# Altium PCB viper_eagle_rep.PcbDoc (part 3 of 4)
Units mm, origin at the board's own origin, x right, y up, seen from the top; angles counter-clockwise.
Board outline 285.4 x 100.18 mm, 2 copper layers (Component Side, Bottom Layer), stack 1.571 mm thick; 351 components, 206 nets, 1213 pads, 248 vias.
Unrouted connection lines stored in the file: 357.
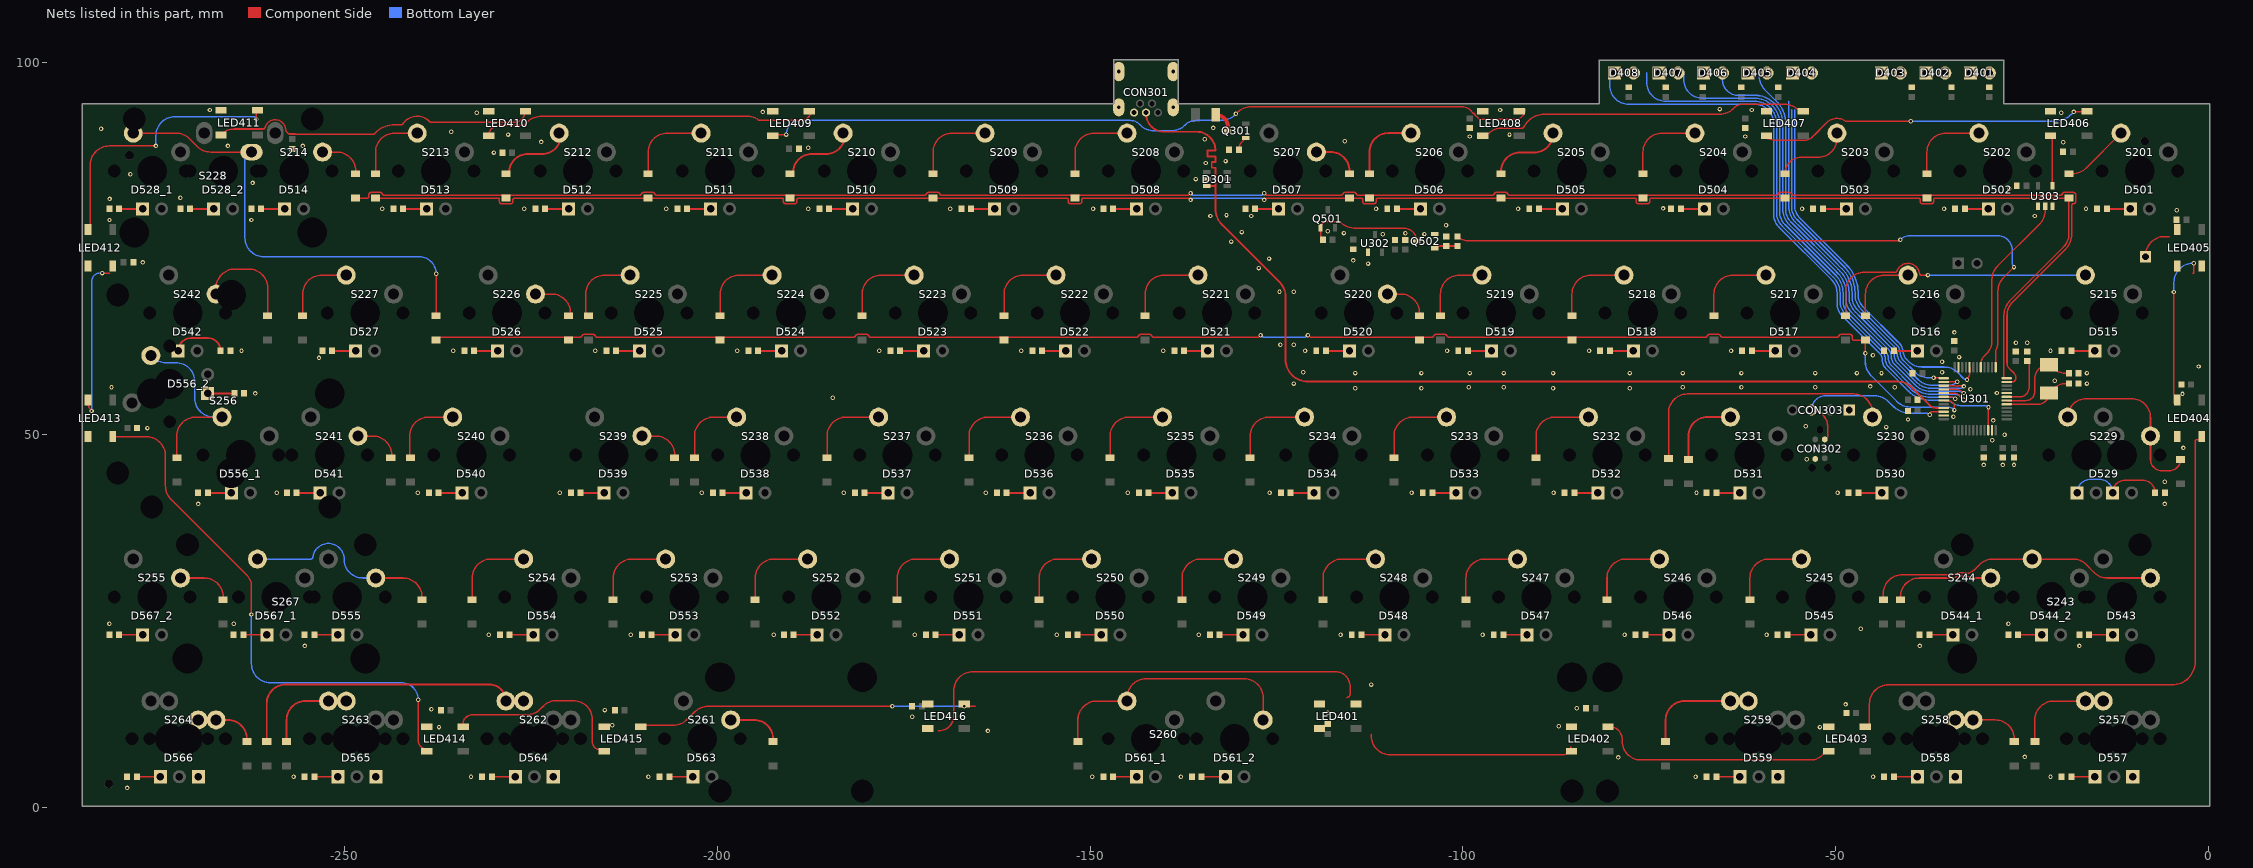
[diagram p2: the nets of this part, all layers, seen from the top]

## Via types
v1: diameter 0.6, hole 0.3, Component Side to Bottom Layer, tented both sides, 247 vias
v2: diameter 1, hole 0.5, Component Side to Bottom Layer, tented both sides, 1 vias

## Nets (pads, with @x,y where several pads share a name; then routed paths per layer and width w, separated by ;. In a path a pad name is that pad's centre, name@x,y a point inside that pad or via, vN(x,y) a via of type N, cw(c..) or ccw(c..) an arc to the next point about the centre after c; other vN are vias at no path point) (continued)
D_P: CON301.3 D301.3 R302.2 U301.33 | length 139.6
  Component Side w0.254: CON301.3@-142.5,93.25 -142.5,93.097 ccw(c-140.081,93.097) -140.081,90.678 -135.712,90.678 cw(c-135.712,88.138) -133.253,88.773 cw(c-135.712,88.138) -133.224,88.646 -133.187,88.287 -133.187,88.138 -134.253,88.138 -134.253,87.376 -133.172,87.376 -133.172,86.614 -133.681,86.614 -133.681,85.852 -133.172,85.852 -133.172,85.725 -133.172,83.312 ; D301.3@-134.344,83.378 -133.238,83.378 -133.172,83.312 ; U301.33@-35.467,53.614 -35.476,53.623 -36.083,53.623 ccw(c-36.114,53.592) -36.114,53.635 -36.511,53.635 cw(c-36.511,54.811) -36.514,53.635 cw(c-36.511,54.811) -37.343,53.98 -39.769,56.406 ccw(c-41.565,54.61) -41.565,57.15 -120.777,57.15 cw(c-120.777,60.147) -123.774,60.147 -123.774,68.62 ccw(c-126.314,68.62) -124.518,70.416 -132.295,78.193 cw(c-130.178,80.31) -133.172,80.31 -133.172,83.312
GND: C301.1 C302.1 C303.1 C304.1 C305.1 C306.1 C307.1 C308.1 C309.2 C310.1 C311.1 C312.1 C313.1 C401.1 C402.1 C403.1 C404.1 C405.1 C406.1 C407.1 C408.1 C409.1 C410.1 C411.1 C412.1 C413.1 C414.1 C415.1 C416.1 CON301.5 CON301.S CON302.5 CON303.4 D301.2 LED401.3 LED402.3 LED403.3 LED404.3 LED405.3 LED406.3 LED407.3 LED408.3 LED409.3 LED410.3 LED411.3 LED412.3 LED413.3 LED414.3 LED415.3 LED416.3 Q502.2 R304.1 R305.2 R501.1 R502.1 R503.1 R504.1 R505.1 R506.1 R507.1 R508.1 R509.1 R510.1 R511.1 R512.1 R513.1 R514.1 R515.1 R516.1 R517.1 R518.1 R519.1 R520.1 R521.1 R522.1 R523.1 R524.1 R525.1 R526.1 R527.1 R528_1.1 R528_2.1 R529.1 R530.1 R531.1 R532.1 R533.1 R534.1 R535.1 R536.1 R537.1 R538.1 R539.1 R540.1 R541.1 R542.1 R543.1 R544.1 R545.1 R546.1 R547.1 R548.1 R549.1 R550.1 R551.1 R552.1 R553.1 R554.1 R554_2.1 R555.1 R556.1 R556_2.1 R557.1 R558.1 R559.1 R561_1.1 R561_2.1 R563.1 R565.1 R566.1 R567_1.1 R567_2.1 R570.2 R654.1 U301.8 U301.23 U301.35 U301.47 U302.1 U303.1 U303.3
  other v1: -279.198,2.64 -256.875,4.135 -233.068,4.135 -209.256,4.135 -149.724,4.135 -137.818,4.135 -68.762,4.135 -44.944,4.135 -21.137,4.135 -79.121,6.731 -24.58,6.796 -163.703,10.287 -237.363,10.795 -52.07,10.795 -87.122,10.922 -214.122,11.049 -173.863,12.192 -118.11,12.7 -215.138,13.081 -238.379,13.208 -84.709,13.335 -48.641,13.843 -112.268,16.51 -255.385,21.69 -38.69,21.69 -17.261,21.69 -230.687,23.185 -211.637,23.185 -192.46,23.185 -173.537,23.185 -154.487,23.185 -135.437,23.185 -116.387,23.185 -97.337,23.185 -78.287,23.185 -59.237,23.185 -46.609,24.003 -281.58,24.68 -264.91,24.68 -26.786,24.68 -269.68,40.74 -5.801,40.74 -259.13,42.235 -240.212,42.235 -221.162,42.235 -202.112,42.235 -183.062,42.235 -164.012,42.235 -144.962,42.235 -125.912,42.235 -106.862,42.235 -87.812,42.235 -68.635,42.235 -49.712,42.235 -5.801,43.73 -30.099,45.974 -27.559,45.974 -26.035,45.974 -53.848,46.736 -3.302,48.26 -28.956,49.276 -27.305,50.038 -276.479,50.927 -43.18,51.054 -53.975,51.181 -28.829,51.943 -40.259,52.07 -34.163,52.451 -184.531,54.991 -3.429,55.499 -262.015,55.575 -28.321,55.626 -31.877,56.134 -114.427,56.261 -105.537,56.261 -87.884,56.261 -77.597,56.261 -281.305,56.388 -99.187,56.388 -94.488,56.388 -70.485,56.388 -62.611,56.388 -52.705,56.388 -42.037,56.388 -45.339,56.515 -122.682,56.896 -16.256,56.896 -20.574,57.277 -114.427,58.293 -105.537,58.293 -99.06,58.293 -94.488,58.293 -87.884,58.293 -77.597,58.293 -70.485,58.293 -62.611,58.293 -52.705,58.293 -47.117,58.293 -43.815,58.293 -16.256,58.293 -121.412,58.42 -35.687,58.42 -1.27,59.182 -35.687,59.817 -253.463,60.325 -33.401,60.452 -44.958,60.706 -263.862,61.285 -235.45,61.285 -216.4,61.285 -197.35,61.285 -178.3,61.285 -159.25,61.285 -140.2,61.285 -121.15,61.285 -102.1,61.285 -83.05,61.285 -64,61.285 -21.137,61.285 -124.46,62.103 -122.682,62.103 -25.781,62.357 -24.257,62.357 -34.036,63.754 -124.587,69.215 -122.682,69.215 -127.381,72.39 -112.71,72.997 -277.114,73.152 -114.681,73.42 -125.984,73.66 -131.064,75.946 -110.744,76.933 -105.144,76.95 -107.696,77.06 -115.951,77.089 -129.667,77.216 -118.11,77.343 -102.235,78.145 -281.574,78.84 -262.53,78.84 -133.858,79.375 -128.368,79.375 -23.241,79.375 -131.699,79.502 -4.191,80.137 -244.975,80.335 -225.925,80.335 -206.875,80.335 -187.825,80.335 -168.775,80.335 -149.606,80.335 -111.625,80.335 -92.575,80.335 -54.475,80.335 -35.425,80.335 -16.375,80.335 -73.123,80.391 -281.559,81.661 -272.049,81.83 -26.67,83.058 -262.382,83.82 -135.839,84.328 -278.765,84.992 -134.493,86.487 -131.826,86.741 -229.997,87.884 -187.833,88.519 -265.684,88.773 -255.651,88.773 -19.431,89.281 -223.647,89.31 -115.824,89.408 -134.62,89.662 -99.06,90.043 -62.103,90.043 -228.092,90.297 -93.726,90.297 -235.712,90.678 -282.702,91.088 -133.477,91.186 -96.647,91.567 -232.283,93.218 -19.685,93.218 -193.929,93.345 -268.097,93.599 -94.996,93.599 -61.214,93.599 -65.532,93.726
led1: D401.2 U301.20 | length 49.9
  Component Side w0.203: v1(-32.341,57.404) -32.341,57.448 ccw(c-33.182,58.29) -31.998,58.171 ccw(c-33.182,58.29) -31.992,58.29 U301.20@-31.992,59.089
  Bottom Layer w0.203: -55.471,93.599 -55.471,80.834 ccw(c-52.931,80.834) -54.727,79.038 -48.55,72.862 -48.534,72.845 cw(c-52.324,69.052) -48.529,72.84 cw(c-52.324,69.052) -47.1,70.264 cw(c-52.324,69.052) -46.965,69.246 ccw(c-46.762,69.253) -46.962,69.215 -46.962,68.896 ccw(c-44.422,68.896) -46.218,67.1 -41.629,62.511 -41.439,62.321 cw(c-42.752,61.007) -41.437,62.319 cw(c-42.752,61.007) -40.907,61.225 ccw(c-40.705,61.249) -40.894,61.174 ccw(c-39.439,61.174) -40.894,61.17 ccw(c-39.439,61.174) -40.468,60.146 -40.181,59.859 ccw(c-38.385,61.655) -38.385,59.115 -35.391,59.115 cw(c-35.391,56.575) -33.595,58.371 -32.831,57.607 ccw(c-32.341,58.098) v1(-32.341,57.404)
led2: D402.2 U301.25 | length 45.5
  Component Side w0.203: v1(-36.83,57.658) U301.25@-35.471,57.658
  Bottom Layer w0.203: -55.874,93.599 -55.874,80.667 ccw(c-53.334,80.667) -55.13,78.871 -48.818,72.56 cw(c-52.324,69.052) -48.814,72.555 cw(c-52.324,69.052) -47.365,69.095 ccw(c-47.162,69.097) -47.365,69.088 -47.365,68.991 -47.365,68.896 ccw(c-44.422,68.896) -46.503,66.815 -46.359,66.671 -41.723,62.036 cw(c-42.752,61.007) -41.297,61.007 ccw(c-39.842,61.007) -40.872,59.979 ; -40.871,59.978 -39.295,58.402 ccw(c-37.499,60.198) -37.797,57.676 ccw(c-37.499,60.198) -37.499,57.658 v1(-36.83,57.658)
led3: D403.2 U301.26 | length 51.3
  Component Side w0.203: U301.26@-35.467,57.114 -33.783,57.114 ccw(c-33.783,57.289) v1@-33.66,57.165
  Bottom Layer w0.203: -56.277,94.742 -56.277,80.667 ccw(c-53.334,80.667) -55.415,78.586 -54.835,78.007 -50.2,73.371 -49.105,72.276 cw(c-52.324,69.052) -49.1,72.271 cw(c-52.324,69.052) -47.768,69.058 -47.768,68.562 ccw(c-45.228,68.562) -47.768,68.557 ccw(c-45.228,68.562) -47.024,66.766 -42.127,61.869 ; -42.126,61.868 cw(c-43.155,60.84) -41.7,60.84 ccw(c-40.246,60.84) -41.275,59.812 -38.882,57.419 ccw(c-37.086,59.215) -37.086,56.675 -34.801,56.675 ccw(c-34.801,58.296) v1(-33.655,57.15)
led4: D404.2 U301.27 | length 59
  Component Side w0.203: U301.27@-35.467,56.614 -33.974,56.614 cw(c-33.973,56.411) -33.893,56.597 ccw(c-33.655,57.15) -33.655,56.548 ccw(c-33.655,57.15) -33.417,56.597 cw(c-33.337,56.411) -33.336,56.614 -33.025,56.614 cw(c-33.025,56.228) v1(-32.752,56.501) v1@-32.639,56.388
  Bottom Layer w0.203: -60.198,98.565 -60.198,98.089 ccw(c-57.658,98.089) -59.454,96.293 -58.162,95.001 cw(c-60.833,91.821) -56.68,91.821 -56.68,80.333 ccw(c-54.14,80.333) -55.936,78.537 -49.66,72.26 -49.389,71.99 cw(c-52.324,69.052) -49.385,71.986 cw(c-52.324,69.052) -48.171,69.06 -48.171,68.654 -48.171,68.562 ccw(c-45.228,68.562) -48.171,68.557 ccw(c-45.228,68.562) -47.31,66.481 -46.612,65.783 -42.53,61.702 cw(c-43.558,60.673) -42.104,60.673 ccw(c-40.649,60.673) -41.678,59.645 ; -41.677,59.644 -39.049,57.016 ccw(c-37.253,58.812) -37.253,56.272 -33.197,56.272 ccw(c-33.197,56.795) -32.828,56.425 v1(-32.752,56.501)
led5: D405.2 U301.28 | length 63.9
  Component Side w0.203: U301.28@-35.467,56.114 -33.944,56.114 cw(c-33.944,54.448) v1(-32.766,55.626)
  Bottom Layer w0.203: -65.151,98.565 -65.151,97.663 ccw(c-63.056,97.663) -63.158,95.571 ccw(c-63.148,95.774) -63.148,95.571 -60.833,95.571 cw(c-60.833,91.821) -60.704,95.568 cw(c-60.833,91.821) -57.083,91.821 -57.083,80.333 ccw(c-54.14,80.333) -56.222,78.252 -54.961,76.992 -50.199,72.229 -49.673,71.704 cw(c-52.324,69.052) -49.671,71.702 cw(c-52.324,69.052) -48.574,69.052 -48.574,68.228 ccw(c-46.034,68.228) -47.83,66.432 -42.933,61.535 ; -42.932,61.534 cw(c-43.962,60.506) -42.507,60.506 ccw(c-41.052,60.506) -42.081,59.478 -40.133,57.53 -39.334,56.73 ccw(c-37.253,58.812) -37.253,55.869 -33.46,55.869 cw(c-33.46,55.04) -32.873,55.626 v1(-32.766,55.626)
led6: D406.2 U301.29 | length 69.7
  Component Side w0.203: U301.29@-35.467,55.614 -34.263,55.614 cw(c-34.263,54.117) -33.204,55.175 v1(-32.766,54.737)
  Bottom Layer w0.203: -70.358,98.565 -70.358,97.707 ccw(c-67.818,97.707) -67.818,95.167 -60.833,95.167 cw(c-60.833,91.821) -57.487,91.821 -57.487,79.999 ccw(c-54.947,79.999) -56.743,78.203 -50.293,71.754 -49.958,71.418 ; -49.957,71.417 cw(c-52.324,69.052) -48.978,69.052 -48.978,68.061 ccw(c-46.438,68.061) -48.234,66.265 -43.336,61.368 cw(c-44.365,60.339) -42.91,60.339 ccw(c-41.455,60.339) -42.485,59.311 ; -42.484,59.31 -39.618,56.444 ccw(c-37.253,58.812) -37.253,55.466 -34.01,55.466 cw(c-34.01,54.222) -33.96,55.465 ; -33.941,55.465 cw(c-33.909,54.864) -33.909,55.466 cw(c-33.909,54.864) -33.694,55.426 ccw(c-33.622,55.616) -33.676,55.42 cw(c-34.01,54.222) -33.13,55.101 v1(-32.766,54.737)
led7: D407.2 U301.30 | length 72.4
  Component Side w0.203: U301.30@-35.467,55.114 -34.513,55.114 cw(c-34.513,54.26) v1(-33.909,54.864)
  Bottom Layer w0.203: -75.311,98.565 -75.311,97.304 ccw(c-72.771,97.304) -72.771,94.764 -60.833,94.764 cw(c-60.833,91.821) -57.89,91.821 -57.89,79.832 ccw(c-55.35,79.832) -57.146,78.036 -51.15,72.04 -50.242,71.132 cw(c-52.324,69.052) -49.381,69.052 -49.381,68.061 ccw(c-46.438,68.061) -48.519,65.98 -48.038,65.5 -43.784,61.245 ; -43.783,61.245 cw(c-44.92,60.109) -43.315,60.193 ccw(c-43.112,60.203) -43.313,60.172 ccw(c-41.858,60.172) -43.313,60.168 ccw(c-41.858,60.172) -42.888,59.144 -40.45,56.706 -39.902,56.158 ccw(c-37.253,58.812) -37.253,55.062 -34.388,55.062 cw(c-34.388,54.385) -33.999,54.94 cw(c-34.388,54.385) v1(-33.909,54.864)
led8: D408.2 U301.46 | length 83.9
  Component Side w0.203: U301.46@-29.492,50.639 v1@-29.492,53.723
  Bottom Layer w0.203: D408.2@-80.264,98.565 -80.264,96.901 ccw(c-77.724,96.901) -77.724,94.361 -60.833,94.361 cw(c-60.833,91.821) -58.293,91.821 -58.293,79.665 ccw(c-55.753,79.665) -57.549,77.869 -50.528,70.848 cw(c-52.324,69.052) -49.784,69.052 -49.784,67.727 ccw(c-47.244,67.727) -49.04,65.931 -44.069,60.96 cw(c-44.92,60.109) -43.716,60.109 ccw(c-42.011,60.109) -43.217,58.903 ; -43.217,58.903 -40.187,55.873 ccw(c-37.253,58.812) -40.138,55.825 ; -40.137,55.824 ccw(c-37.253,58.812) -37.87,54.705 ccw(c-37.253,58.812) -37.253,54.659 -34.969,54.659 cw(c-34.969,54.058) -34.544,54.483 ccw(c-33.241,55.786) -33.241,53.943 -30.02,53.943 cw(c-30.02,53.19) -29.487,53.723 v1(-29.457,53.723)
NetC307_2: C307.2 U301.5 X301.1 | length 9.6
  Component Side w0.203: U301.5@-27.017,54.114 -22.853,54.114 ccw(c-22.853,55.631) -22.225,54.25 ccw(c-22.853,55.631) X301.1@-21.336,55.631 -20.815,56.152 cw(c-19.019,54.356) -19.019,56.896 C307.2@-18.684,56.896
NetC308_2: C308.2 U301.6 X301.2 | length 12.2
  Component Side w0.203: U301.6@-27.017,54.614 -24.446,54.614 ccw(c-24.446,55.819) -23.241,55.819 -23.241,57.526 cw(c-21.336,57.526) X301.2@-21.336,59.431 -20.942,59.037 ccw(c-19.146,60.833) -19.146,58.293 C308.2@-18.684,58.293
NetCON401_1: CON401.1 LED405.2 | length 4.8
  Component Side w0.203: CON401.1@-8.382,73.914 -8.382,74.078 cw(c-5.842,74.078) -5.842,76.618 -5.206,76.618
NetD201_1: D201.1 S201.1 | length 9.1
  Component Side w0.203: D201.1@-18.669,85.05 -18.187,85.05 ccw(c-18.187,87.59) -16.391,85.794 S201.1@-11.69,90.495
NetD202_1: D202.1 S202.1 | length 11.3
  Component Side w0.203: D202.1@-37.719,85.05 -37.719,87.955 cw(c-35.179,87.955) -35.179,90.495 S202.1@-30.74,90.495
NetD203_1: D203.1 S203.1 | length 10.4
  Component Side w0.203: D203.1@-56.769,85.05 cw(c-54.57,85.05) -55.958,86.755 cw(c-54.57,85.05) -54.57,87.249 -52.33,87.249 ccw(c-52.33,89.789) -49.991,88.8 ccw(c-52.33,89.789) -49.79,89.789 S203.1@-49.79,90.495
NetD204_1: D204.1 S204.1 | length 11.3
  Component Side w0.203: D204.1@-75.819,85.05 -75.819,87.955 cw(c-73.279,87.955) -73.279,90.495 S204.1@-68.84,90.495
NetD205_1: D205.1 S205.1 | length 10.2
  Component Side w0.254: D205.1@-94.869,85.05 -94.869,85.344 cw(c-92.329,85.344) -92.329,87.884 -90.43,87.884 ccw(c-90.43,90.424) -87.89,90.424 S205.1@-87.89,90.495
NetD206_1: D206.1 S206.1 | length 9.9
  Component Side w0.254: D206.1@-112.522,85.05 -112.522,87.955 cw(c-109.982,87.955) -109.982,90.495 S206.1@-106.94,90.495
NetD207_1: D207.1 S207.1 | length 6.3
  Component Side w0.254: S207.1@-119.64,87.955 -117.729,87.955 cw(c-117.729,85.415) -115.189,85.415 D207.1@-115.189,85.05
NetD208_1: D208.1 S208.1 | length 11.3
  Component Side w0.203: D208.1@-152.019,85.05 -152.019,87.955 cw(c-149.479,87.955) -149.479,90.495 S208.1@-145.04,90.495
NetD209_1: D209.1 S209.1 | length 11.3
  Component Side w0.203: D209.1@-171.069,85.05 -171.069,87.955 cw(c-168.529,87.955) -168.529,90.495 S209.1@-164.09,90.495
NetD210_1: D210.1 S210.1 | length 10.2
  Component Side w0.254: D210.1@-189.871,84.867 -189.871,85.161 cw(c-187.331,85.161) -187.331,87.701 -185.432,87.701 ccw(c-185.432,90.241) -182.892,90.241 S210.1@-182.892,90.312
NetD211_1: D211.1 S211.1 | length 11.5
  Component Side w0.203: D211.1@-209.296,85.05 -209.296,87.955 cw(c-206.756,87.955) -206.756,90.495 S211.1@-202.19,90.495
NetD212_1: D212.1 S212.1 | length 10.2
  Component Side w0.254: D212.1@-227.971,84.867 -227.971,85.161 cw(c-225.431,85.161) -225.431,87.701 -223.532,87.701 ccw(c-223.532,90.241) -220.992,90.241 S212.1@-220.992,90.312
NetD213_1: D213.1 S213.1 | length 9.9
  Component Side w0.203: D213.1@-245.872,85.05 -245.872,87.955 cw(c-243.332,87.955) -243.332,90.495 -240.538,90.495 S213.1@-240.29,90.495
NetD214_1: D214.1 S214.1 | length 6.3
  Component Side w0.203: S214.1@-252.99,87.955 -251.079,87.955 cw(c-251.079,85.415) -248.539,85.415 D214.1@-248.539,85.05
NetD215_1: D215.1 S215.2 | length 38.3
  Component Side w0.203: D215.1@-48.641,66 -48.641,69.308 cw(c-46.101,69.308) -46.101,71.848 -42.672,71.848 -41.933,71.848 ccw(c-41.933,72.051) -41.742,71.982 cw(c-40.265,71.445) -38.704,71.625 ccw(c-38.502,71.648) -38.502,71.445 v1(-37.592,71.445)
  Bottom Layer w0.203: v1(-37.592,71.445) S215.2@-16.452,71.445
NetD216_1: D216.1 S216.1 | length 10.1
  Component Side w0.203: D216.1@-45.974,66 -45.974,68.905 cw(c-43.434,68.905) -43.434,71.445 S216.1@-40.265,71.445
NetD217_1: D217.1 S217.1 | length 11.3
  Component Side w0.203: D217.1@-66.294,66 -66.294,68.905 cw(c-63.754,68.905) -63.754,71.445 S217.1@-59.315,71.445
NetD218_1: D218.1 S218.1 | length 11.3
  Component Side w0.203: D218.1@-85.344,66 -85.344,68.905 cw(c-82.804,68.905) -82.804,71.445 S218.1@-78.365,71.445
NetD219_1: D219.1 S219.1 | length 9.9
  Component Side w0.203: D219.1@-102.997,66 -102.997,68.905 cw(c-100.457,68.905) -100.457,71.445 S219.1@-97.415,71.445
NetD220_1: D220.1 S220.1 | length 6.1
  Component Side w0.203: S220.1@-110.115,68.905 -108.331,68.905 cw(c-108.331,66.365) -105.791,66.365 D220.1@-105.791,66
NetD221_1: D221.1 S221.1 | length 11.5
  Component Side w0.203: D221.1@-142.621,66 -142.621,68.905 cw(c-140.081,68.905) -140.081,71.445 S221.1@-135.515,71.445
NetD222_1: D222.1 S222.1 | length 11.3
  Component Side w0.203: D222.1@-161.544,66 -161.544,68.905 cw(c-159.004,68.905) -159.004,71.445 S222.1@-154.565,71.445
NetD223_1: D223.1 S223.1 | length 11.3
  Component Side w0.203: D223.1@-180.594,66 -180.594,68.905 cw(c-178.054,68.905) -178.054,71.445 S223.1@-173.615,71.445
NetD224_1: D224.1 S224.1 | length 11.3
  Component Side w0.203: D224.1@-199.644,66 -199.644,68.905 cw(c-197.104,68.905) -197.104,71.445 S224.1@-192.665,71.445
NetD225_1: D225.1 S225.1 | length 10.3
  Component Side w0.203: D225.1@-217.678,66 -217.678,68.905 cw(c-215.138,68.905) -215.138,71.445 S225.1@-211.715,71.445
NetD226_1: D226.1 S226.1 | length 6.5
  Component Side w0.203: S226.1@-224.415,68.905 -222.25,68.905 cw(c-222.25,66.365) -219.71,66.365 D226.1@-219.71,66
NetD227_1: D227.1 S227.1 | length 10.2
  Component Side w0.203: D227.1@-255.651,66 -255.651,68.905 cw(c-253.111,68.905) -253.111,71.445 S227.1@-249.815,71.445
NetD228_1: D228.1 S228.2 | length 63.1
  Component Side w0.203: S228.2@-278.16,90.271 S228.2@-278.384,90.495 -272.649,90.495 cw(c-272.649,87.955) -270.853,89.751 -269.801,88.699 ccw(c-268.005,90.495) -268.005,87.955 S228.2@-262.509,87.955 ; D228.1@-237.744,66 v1(-237.744,71.628)
  Bottom Layer w0.203: S228.2@-262.509,87.955 ccw(c-262.509,87.066) -263.398,87.066 -263.398,76.454 ccw(c-260.858,76.454) -260.858,73.914 -240.03,73.914 cw(c-240.03,71.628) v1(-237.744,71.628)
NetD229_1: D229.1 S229.1 | length 25.3
  Component Side w0.203: S229.1@-18.834,52.395 cw(c-16.365,52.395) -16.365,54.864 -10.261,54.864 cw(c-10.261,52.324) -7.721,52.324 S229.1@-7.721,49.855 -7.721,46.71 ccw(c-6.223,46.71) -6.223,45.212 -5.191,45.212 ccw(c-5.191,46.72) D229.1@-3.683,46.72
NetD230_1: D230.1 S230.1 | length 36.9
  Component Side w0.203: D230.1@-72.39,46.847 -72.39,52.959 cw(c-69.85,52.959) -69.85,55.499 -47.567,55.499 cw(c-47.567,52.959) -45.027,52.959 S230.1@-45.027,52.395
NetD231_1: D231.1 S231.1 | length 10.2
  Component Side w0.254: D231.1@-69.723,46.72 -69.723,49.855 cw(c-67.183,49.855) -67.183,52.395 S231.1@-64.077,52.395
NetD232_1: D232.1 S232.1 | length 11.4
  Component Side w0.203: D232.1@-90.17,46.95 -90.17,49.855 cw(c-87.63,49.855) -87.63,52.395 S232.1@-83.127,52.395
NetD233_1: D233.1 S233.1 | length 11.4
  Component Side w0.203: D233.1@-109.22,46.95 -109.22,49.855 cw(c-106.68,49.855) -106.68,52.395 S233.1@-102.177,52.395
NetD234_1: D234.1 S234.1 | length 12.5
  Component Side w0.203: D234.1@-128.524,46.95 -128.524,49.855 cw(c-125.984,49.855) -125.984,52.395 S234.1@-121.227,52.395
  Bottom Layer w0.254: S234.1@-121.793,51.83 S234.1@-121.227,52.395
NetD235_1: D235.1 S235.1 | length 11.4
  Component Side w0.203: D235.1@-147.32,46.95 -147.32,49.855 cw(c-144.78,49.855) -144.78,52.395 S235.1@-140.277,52.395
NetD236_1: D236.1 S236.1 | length 11.3
  Component Side w0.203: D236.1@-166.243,46.95 -166.243,49.855 cw(c-163.703,49.855) -163.703,52.395 S236.1@-159.327,52.395
NetD237_1: D237.1 S237.1 | length 11.3
  Component Side w0.203: D237.1@-185.293,46.95 -185.293,49.855 cw(c-182.753,49.855) -182.753,52.395 S237.1@-178.377,52.395
NetD238_1: D238.1 S238.1 | length 10
  Component Side w0.203: D238.1@-203.073,46.95 -203.073,49.855 cw(c-200.533,49.855) -200.533,52.395 S238.1@-197.427,52.395
NetD239_1: D239.1 S239.1 | length 6.2
  Component Side w0.203: S239.1@-210.127,49.855 -208.28,49.855 cw(c-208.28,47.315) -205.74,47.315 D239.1@-205.74,46.95
NetD240_1: D240.1 S240.1 | length 10.1
  Component Side w0.203: D240.1@-241.3,46.95 -241.3,49.855 cw(c-238.76,49.855) -238.76,52.395 S240.1@-235.527,52.395
NetD241_1: D241.1 S241.1 | length 6.3
  Component Side w0.203: S241.1@-248.202,49.855 -246.253,49.855 cw(c-246.253,47.315) -243.713,47.315 D241.1@-243.713,46.95
NetD242_1: D242.1 S242.1 | length 15
  Component Side w0.203: S242.1@-267.277,68.905 -267.277,69.723 cw(c-264.737,69.723) -264.737,72.263 -263.779,72.263 -262.89,72.263 cw(c-262.89,69.723) -260.35,69.723 D242.1@-260.35,66
  Bottom Layer w0.254: S242.1@-267.734,68.448 S242.1@-267.277,68.905
NetD243_1: D243.1 S243.1 | length 39.6
  Component Side w0.203: D243.1@-43.561,27.9 -43.561,28.719 cw(c-41.021,28.719) -41.021,31.259 -34.276,31.259 ccw(c-34.276,31.462) -34.199,31.274 cw(c-32.96,28.265) -32.214,31.433 ccw(c-32.168,31.631) -32.093,31.442 ccw(c-33.039,33.799) -31.243,32.003 -30.645,32.601 cw(c-28.849,30.805) -28.849,33.345 S243.1@-23.596,33.345 -18.141,33.345 cw(c-18.141,30.805) -16.345,32.601 -15.293,31.549 ccw(c-13.497,33.345) -13.497,30.805 S243.1@-7.721,30.805
NetD244_1: D244.1 S244.1 | length 14
  Component Side w0.203: D244.1@-41.275,27.9 -41.275,28.265 cw(c-38.735,28.265) -38.735,30.805 -34.256,30.805 ccw(c-34.256,31.059) -34.149,30.829 cw(c-32.96,28.265) -31.771,30.829 ccw(c-31.664,31.059) -31.664,30.805 S244.1@-29.15,30.805
NetD245_1: D245.1 S245.1 | length 11.3
  Component Side w0.203: D245.1@-61.468,27.9 -61.468,30.805 cw(c-58.928,30.805) -58.928,33.345 S245.1@-54.552,33.345
NetD246_1: D246.1 S246.1 | length 12.4
  Component Side w0.203: D246.1@-80.645,27.9 -80.645,30.805 cw(c-78.105,30.805) -78.105,33.345 S246.1@-73.602,33.345 S246.1@-74.295,32.652
NetD247_1: D247.1 S247.1 | length 11.3
  Component Side w0.203: D247.1@-99.568,27.9 -99.568,30.805 cw(c-97.028,30.805) -97.028,33.345 S247.1@-92.652,33.345
NetD248_1: D248.1 S248.1 | length 11.4
  Component Side w0.203: D248.1@-118.745,27.9 -118.745,30.805 cw(c-116.205,30.805) -116.205,33.345 S248.1@-111.702,33.345
NetD249_1: D249.1 S249.1 | length 11.3
  Component Side w0.203: D249.1@-137.668,27.9 -137.668,30.805 cw(c-135.128,30.805) -135.128,33.345 S249.1@-130.752,33.345
NetD250_1: D250.1 S250.1 | length 11.4
  Component Side w0.203: D250.1@-156.845,27.9 -156.845,30.805 cw(c-154.305,30.805) -154.305,33.345 S250.1@-149.802,33.345
NetD251_1: D251.1 S251.1 | length 11.4
  Component Side w0.203: D251.1@-175.895,27.9 -175.895,30.805 cw(c-173.355,30.805) -173.355,33.345 S251.1@-168.852,33.345
NetD252_1: D252.1 S252.1 | length 11.4
  Component Side w0.203: D252.1@-194.945,27.9 -194.945,30.805 cw(c-192.405,30.805) -192.405,33.345 S252.1@-187.902,33.345
NetD253_1: D253.1 S253.1 | length 11.4
  Component Side w0.203: D253.1@-213.995,27.9 -213.995,30.805 cw(c-211.455,30.805) -211.455,33.345 S253.1@-206.952,33.345
NetD254_1: D254.1 S254.1 | length 11.3
  Component Side w0.203: D254.1@-232.918,27.9 -232.918,30.805 cw(c-230.378,30.805) -230.378,33.345 S254.1@-226.002,33.345
NetD255_1: D255.1 S255.1 | length 7.5
  Component Side w0.203: S255.1@-272.04,30.805 -268.859,30.805 cw(c-268.859,28.265) -266.319,28.265 D255.1@-266.319,27.9
NetD256_1: D256.1 S256.1 | length 25.4
  Component Side w0.203: S256.1@-275.642,61.547 S256.1@-275.617,61.573 ; D256.1@-272.542,46.95 -272.542,49.855 cw(c-270.002,49.855) -270.002,52.395 S256.1@-266.49,52.395
  Bottom Layer w0.203: S256.1@-276.02,60.655 -275.799,60.434 ccw(c-274.003,62.23) -274.003,59.69 -272.669,59.69 cw(c-272.669,57.15) -270.129,57.15 -270.129,54.935 ccw(c-267.589,54.935) -267.589,52.395 S256.1@-266.49,52.395
NetD257_1: D257.1 S257.2 | length 11.1
  Component Side w0.203: D257.1@-23.241,8.85 -23.241,11.755 cw(c-20.701,11.755) -20.701,14.295 S257.2@-16.452,14.295
NetD258_1: D258.1 S258.1 | length 9.7
  Component Side w0.203: S258.1@-33.909,11.755 S258.1@-31.528,11.755 -28.54,11.755 cw(c-28.54,9.215) -26,9.215 D258.1@-26,8.85
NetD259_1: D259.1 S259.2 | length 13
  Component Side w0.254: D259.1@-72.771,8.85 -72.771,11.755 cw(c-70.231,11.755) -70.231,14.295 S259.2@-64.077,14.295
NetD260_1: D260.1 S260.2 | length 35.5
  Component Side w0.203: D260.1@-151.638,8.85 -151.638,11.755 cw(c-149.098,11.755) -149.098,14.295 S260.2@-145.039,14.295 -145.039,14.732 cw(c-142.499,14.732) -142.499,17.272 -129.323,17.272 cw(c-129.323,14.732) -126.783,14.732 S260.2@-126.783,11.755
NetD261_1: D261.1 S261.1 | length 7.5
  Component Side w0.254: S261.1@-198.221,11.755 -195.072,11.755 cw(c-195.072,9.215) -192.532,9.215 D261.1@-192.532,8.85
NetD262_1: D262.1 S262.2 | length 39.9
  Component Side w0.254: D262.1@-260.477,8.85 -260.477,13.97 cw(c-257.937,13.97) -257.937,16.51 -230.598,16.51 cw(c-230.598,14.295) S262.2@-228.383,14.295
NetD263_1: D263.1 S263.2 | length 10
  Component Side w0.254: D263.1@-257.81,8.85 -257.81,11.755 cw(c-255.27,11.755) -255.27,14.295 S263.2@-252.19,14.295
NetD264_1: D264.1 S264.1 | length 8.3
  Component Side w0.254: S264.1@-269.658,11.755 S264.1@-267.277,11.755 -265.684,11.755 cw(c-265.684,9.215) -263.144,9.215 D264.1@-263.144,8.85
NetD267_1: D267.1 S267.1 | length 27.7
  Component Side w0.203: S267.1@-245.845,30.805 -242.189,30.805 cw(c-242.189,28.265) -239.649,28.265 D267.1@-239.649,27.9
  Bottom Layer w0.203: S267.1@-261.72,33.345 -254.537,33.345 ccw(c-254.537,33.599) -254.285,33.572 cw(c-252.195,33.345) -250.105,33.572 cw(c-252.195,33.345) -250.105,33.57 cw(c-252.195,33.345) -250.099,33.192 -250.1,33.176 ccw(c-247.565,33.345) -247.565,30.805 S267.1@-245.845,30.805
NetD401_1: D401.1 R401.2
NetD402_1: D402.1 R402.2
NetD403_1: D403.1 R403.2
NetD404_1: D404.1 R404.2
NetD405_1: D405.1 R405.2
NetD406_1: D406.1 R406.2
NetD407_1: D407.1 R407.2
NetD408_1: D408.1 R408.2
NetD501_2: D501.2 R501.2 | length 3.2
  Component Side w0.254: R501.2@-13.58,80.335 D501.2@-10.42,80.335
NetD502_2: D502.2 R502.2 | length 3.2
  Component Side w0.254: R502.2@-32.63,80.335 D502.2@-29.47,80.335
NetD503_2: D503.2 R503.2 | length 3.2
  Component Side w0.254: R503.2@-51.68,80.335 D503.2@-48.52,80.335
NetD504_2: D504.2 R504.2 | length 3.2
  Component Side w0.254: R504.2@-70.73,80.335 D504.2@-67.57,80.335
NetD505_2: D505.2 R505.2 | length 3.2
  Component Side w0.254: R505.2@-89.78,80.335 D505.2@-86.62,80.335
NetD506_2: D506.2 R506.2 | length 3.2
  Component Side w0.254: R506.2@-108.83,80.335 D506.2@-105.67,80.335
NetD507_2: D507.2 R507.2 | length 3.2
  Component Side w0.254: R507.2@-127.88,80.335 D507.2@-124.72,80.335
NetD508_2: D508.2 R508.2 | length 3.2
  Component Side w0.254: R508.2@-146.93,80.335 D508.2@-143.77,80.335
NetD509_2: D509.2 R509.2 | length 3.2
  Component Side w0.254: R509.2@-165.98,80.335 D509.2@-162.82,80.335
NetD510_2: D510.2 R510.2 | length 3.2
  Component Side w0.254: R510.2@-185.03,80.335 D510.2@-181.87,80.335
NetD511_2: D511.2 R511.2 | length 3.2
  Component Side w0.254: R511.2@-204.08,80.335 D511.2@-200.92,80.335
NetD512_2: D512.2 R512.2 | length 3.2
  Component Side w0.254: R512.2@-223.13,80.335 D512.2@-219.97,80.335
NetD513_2: D513.2 R513.2 | length 3.2
  Component Side w0.254: R513.2@-242.18,80.335 D513.2@-239.02,80.335
NetD514_2: D514.2 R514.2 | length 3.2
  Component Side w0.254: R514.2@-261.23,80.335 D514.2@-258.07,80.335
NetD515_2: D515.2 R515.2 | length 3.2
  Component Side w0.254: R515.2@-18.342,61.285 D515.2@-15.182,61.285
NetD516_2: D516.2 R516.2 | length 3.2
  Component Side w0.254: R516.2@-42.155,61.285 D516.2@-38.995,61.285
NetD517_2: D517.2 R517.2 | length 3.2
  Component Side w0.254: R517.2@-61.205,61.285 D517.2@-58.045,61.285
NetD518_2: D518.2 R518.2 | length 3.2
  Component Side w0.254: R518.2@-80.255,61.285 D518.2@-77.095,61.285
NetD519_2: D519.2 R519.2 | length 3.2
  Component Side w0.254: R519.2@-99.305,61.285 D519.2@-96.145,61.285
NetD520_2: D520.2 R520.2 | length 3.2
  Component Side w0.254: R520.2@-118.355,61.285 D520.2@-115.195,61.285
NetD521_2: D521.2 R521.2 | length 3.2
  Component Side w0.254: R521.2@-137.405,61.285 D521.2@-134.245,61.285
NetD522_2: D522.2 R522.2 | length 3.2
  Component Side w0.254: R522.2@-156.455,61.285 D522.2@-153.295,61.285
NetD523_2: D523.2 R523.2 | length 3.2
  Component Side w0.254: R523.2@-175.505,61.285 D523.2@-172.345,61.285
NetD524_2: D524.2 R524.2 | length 3.2
  Component Side w0.254: R524.2@-194.555,61.285 D524.2@-191.395,61.285
NetD525_2: D525.2 R525.2 | length 3.2
  Component Side w0.254: R525.2@-213.605,61.285 D525.2@-210.445,61.285
NetD526_2: D526.2 R526.2 | length 3.2
  Component Side w0.254: R526.2@-232.655,61.285 D526.2@-229.495,61.285
NetD527_2: D527.2 R527.2 | length 3.2
  Component Side w0.254: R527.2@-251.705,61.285 D527.2@-248.545,61.285
NetD528_1_2: D528_1.2 R528_1.2 | length 3.2
  Component Side w0.254: R528_1.2@-280.274,80.335 D528_1.2@-277.114,80.335
NetD528_2_2: D528_2.2 R528_2.2 | length 3.2
  Component Side w0.254: R528_2.2@-270.749,80.335 D528_2.2@-267.589,80.335
NetD529_2: D529.2 R529.2 | length 14.5
  Component Side w0.203: D529.2@-12.801,42.235 cw(c-11.094,42.235) -11.094,43.942 -8.808,43.942 cw(c-8.808,42.235) R529.2@-7.101,42.235
  Bottom Layer w0.203: D529.2@-17.564,42.235 cw(c-15.73,42.235) -15.73,44.069 -14.635,44.069 cw(c-14.635,42.235) D529.2@-12.801,42.235
NetD530_2: D530.2 R530.2 | length 3.2
  Component Side w0.254: R530.2@-46.917,42.235 D530.2@-43.757,42.235
NetD531_2: D531.2 R531.2 | length 3.2
  Component Side w0.254: R531.2@-65.967,42.235 D531.2@-62.807,42.235
NetD532_2: D532.2 R532.2 | length 3.2
  Component Side w0.254: R532.2@-85.017,42.235 D532.2@-81.857,42.235
NetD533_2: D533.2 R533.2 | length 3.2
  Component Side w0.254: R533.2@-104.067,42.235 D533.2@-100.907,42.235
NetD534_2: D534.2 R534.2 | length 3.2
  Component Side w0.254: R534.2@-123.117,42.235 D534.2@-119.957,42.235
NetD535_2: D535.2 R535.2 | length 3.2
  Component Side w0.254: R535.2@-142.167,42.235 D535.2@-139.007,42.235
NetD536_2: D536.2 R536.2 | length 3.2
  Component Side w0.254: R536.2@-161.217,42.235 D536.2@-158.057,42.235
NetD537_2: D537.2 R537.2 | length 3.2
  Component Side w0.254: R537.2@-180.267,42.235 D537.2@-177.107,42.235
NetD538_2: D538.2 R538.2 | length 3.2
  Component Side w0.254: R538.2@-199.317,42.235 D538.2@-196.157,42.235
NetD539_2: D539.2 R539.2 | length 3.2
  Component Side w0.254: R539.2@-218.367,42.235 D539.2@-215.207,42.235
NetD540_2: D540.2 R540.2 | length 3.2
  Component Side w0.254: R540.2@-237.417,42.235 D540.2@-234.257,42.235
NetD541_2: D541.2 R541.2 | length 3.2
  Component Side w0.254: R541.2@-256.462,42.235 D541.2@-253.301,42.235
NetD542_2: D542.2 R542.2 | length 7.6
  Component Side w0.254: D542.2@-272.357,61.285 cw(c-270.651,61.285) -270.651,62.992 -268.364,62.992 cw(c-268.364,61.285) R542.2@-266.657,61.285
NetD543_2: D543.2 R543.2 | length 3.3
  Component Side w0.254: R543.2@-15.961,23.185 D543.2@-12.801,23.185 ccw(c-12.936,23.05) D543.2@-12.936,23.241
NetD544_1_2: D544_1.2 R544.2 | length 3.2
  Component Side w0.254: R544.2@-37.39,23.185 D544_1.2@-34.23,23.185
NetD544_2_2: D544_2.2 R554_2.2 | length 3.2
  Component Side w0.254: R554_2.2@-25.486,23.185 D544_2.2@-22.326,23.185
NetD545_2: D545.2 R545.2 | length 3.2
  Component Side w0.254: R545.2@-56.442,23.185 D545.2@-53.282,23.185
NetD546_2: D546.2 R546.2 | length 3.2
  Component Side w0.254: R546.2@-75.492,23.185 D546.2@-72.332,23.185
NetD547_2: D547.2 R547.2 | length 3.2
  Component Side w0.254: R547.2@-94.542,23.185 D547.2@-91.382,23.185
NetD548_2: D548.2 R548.2 | length 3.2
  Component Side w0.254: R548.2@-113.592,23.185 D548.2@-110.432,23.185
NetD549_2: D549.2 R549.2 | length 3.2
  Component Side w0.254: R549.2@-132.642,23.185 D549.2@-129.482,23.185
NetD550_2: D550.2 R550.2 | length 3.2
  Component Side w0.254: R550.2@-151.692,23.185 D550.2@-148.532,23.185
NetD551_2: D551.2 R551.2 | length 3.2
  Component Side w0.254: R551.2@-170.742,23.185 D551.2@-167.582,23.185
NetD552_2: D552.2 R552.2 | length 3.2
  Component Side w0.254: R552.2@-189.792,23.185 D552.2@-186.632,23.185
NetD553_2: D553.2 R553.2 | length 3.2
  Component Side w0.254: R553.2@-208.842,23.185 D553.2@-205.682,23.185
NetD554_2: D554.2 R554.2 | length 3.2
  Component Side w0.254: R554.2@-227.892,23.185 D554.2@-224.732,23.185
NetD555_2: D555.2 R555.2 | length 3.2
  Component Side w0.254: R555.2@-254.085,23.185 D555.2@-250.925,23.185
NetD556_1_2: D556_1.2 R556.2 | length 3.2
  Component Side w0.254: R556.2@-268.38,42.235 D556_1.2@-265.22,42.235
NetD556_2_2: D556_2.2 R556_2.2 | length 3.2
  Component Side w0.254: D556_2.2@-268.4,55.575 -265.24,55.575
NetD557_2: D557.2 R557.2 | length 3.2
  Component Side w0.254: R557.2@-18.342,4.135 D557.2@-15.182,4.135
NetD558_2: D558.2 R558.2 | length 3.2
  Component Side w0.254: R558.2@-42.149,4.135 D558.2@-38.989,4.135
NetD559_2: D559.2 R559.2 | length 3.2
  Component Side w0.254: R559.2@-65.967,4.135 D559.2@-62.807,4.135
NetD561_1_2: D561_1.2 R561_1.2 | length 3.2
  Component Side w0.254: R561_1.2@-146.929,4.135 D561_1.2@-143.769,4.135
NetD561_2_2: D561_2.2 R561_2.2 | length 3.2
  Component Side w0.254: R561_2.2@-135.023,4.135 D561_2.2@-131.863,4.135
NetD563_2: D563.2 R563.2 | length 3.2
  Component Side w0.254: R563.2@-206.461,4.135 D563.2@-203.301,4.135
NetD564_2: D564.2 R654.2 | length 3.2
  Component Side w0.254: R654.2@-230.273,4.135 D564.2@-227.113,4.135
NetD565_2: D565.2 R565.2 | length 3.2
  Component Side w0.254: R565.2@-254.08,4.135 D565.2@-250.92,4.135
NetD566_2: D566.2 R566.2 | length 3.2
  Component Side w0.254: R566.2@-277.898,4.135 D566.2@-274.738,4.135
NetD567_1_2: D567_1.2 R567_1.2 | length 3.2
  Component Side w0.254: R567_1.2@-263.61,23.185 D567_1.2@-260.45,23.185
NetD567_2_2: D567_2.2 R567_2.2 | length 3.2
  Component Side w0.254: R567_2.2@-280.28,23.185 D567_2.2@-277.12,23.185
NetF301_1: F301.1 Q301.3 | length 3.1
  Component Side w0.508: F301.1@-133.143,92.964 cw(c-133.143,91.323) -131.502,91.323 Q301.3@-131.502,90.805
NetLED401_2: LED401.2 LED402.4 | length 29.4
  Component Side w0.203: -112.275,9.271 -112.275,9.634 ; -112.275,9.869 -112.275,9.634 ; -85.508,8.129 cw(c-86.543,8.129) -86.543,7.094 -90.678,7.094 -106.553,7.094 -109.735,7.094 cw(c-109.735,9.634) -112.275,9.634
NetLED401_4: LED401.4 LED416.2 | length 64.1
  Component Side w0.203: -170.344,10.288 ccw(c-170.344,12.357) -168.275,12.357 -168.275,15.7 cw(c-165.735,15.7) -167.894,17.038 cw(c-165.735,15.7) -165.735,18.24 -117.094,18.24 cw(c-117.094,16.256) -115.534,17.482 cw(c-117.094,16.256) -115.113,16.373 -115.113,15.231 cw(c-115.575,15.231) -115.575,14.769
NetLED402_2: LED402.2 LED403.4 | length 33.2
  Component Side w0.203: LED402.2@-80.519,10.865 -80.316,10.865 cw(c-80.316,9.162) -78.613,9.162 -78.613,8.89 ccw(c-76.109,8.89) -76.109,6.386 -72.517,6.386 -66.929,6.386 -53.261,6.386 ccw(c-53.261,8.43) -51.816,6.985 cw(c-50.587,5.756) -50.587,7.494 LED403.4@-50.329,7.494
NetLED403_2: LED403.2 LED404.4 | length 80.2
  Component Side w0.203: LED403.2@-45.429,10.794 -45.429,13.922 cw(c-42.889,13.922) -42.889,16.462 -4.826,16.462 ccw(c-4.826,19.558) -1.73,19.558 -1.73,49.163 cw(c-1.527,49.163) -1.527,49.366 LED404.4@-1.271,49.366
NetLED404_2: LED404.2 LED405.4 | length 21.8
  Component Side w0.203: LED404.2@-4.571,54.266 v1(-4.571,69.178) ; -2.031,71.718 -1.906,71.718 v1(-1.906,73.024) v1(-1.906,73.024)
  Bottom Layer w0.203: v1(-4.571,69.178) -4.571,70.484 cw(c-2.031,70.484) -2.031,73.024 v1(-1.906,73.024)
NetLED406_2: LED406.2 LED407.4 | length 45.2
  Component Side w0.203: LED407.4@-59.854,90.298 -59.846,90.29 ccw(c-58.05,92.086) -58.05,89.546 -54.102,89.546 ccw(c-54.102,90.957) -53.105,89.959 -52.648,90.416 -51.456,91.608 cw(c-49.375,89.527) -51.354,91.706 ccw(c-51.49,91.856) -51.332,91.729 cw(c-49.79,90.495) -50.369,92.383 cw(c-49.79,90.495) -50.368,92.383 cw(c-49.79,90.495) -48.656,92.112 ccw(c-48.539,92.278) -48.539,92.075 -48.006,92.075 -44.455,92.075 v1(-39.878,92.075) ; v1(-18.033,93.344) v1(-18.033,93.344) LED406.2@-16.473,93.344
  Bottom Layer w0.203: v1(-39.878,92.075) -20.354,92.075 -20.227,92.202 ccw(c-20.227,94.742) -18.431,92.946 v1(-18.033,93.344)
NetLED406_4: LED406.4 U303.4 | length 6.9
  Component Side w0.203: LED406.4@-21.373,90.044 cw(c-21.373,89.565) -20.894,89.565 U303.4@-20.894,83.417
NetLED407_2: LED407.2 LED408.4 | length 43.1
  Component Side w0.203: -96.52,90.426 -96.512,90.434 cw(c-94.716,88.638) -94.716,91.178 -92.18,91.178 -91.99,91.178 ccw(c-91.99,91.381) -91.808,91.291 cw(c-89.027,89.931) -90.953,92.355 cw(c-89.027,89.931) -89.027,93.027 -65.506,93.027 ccw(c-65.506,95.567) -63.709,93.771 -63.596,93.884 ; -63.595,93.885 cw(c-62.445,92.733) -62.445,94.361 -56.769,94.361 cw(c-56.769,91.821) -54.973,93.617 LED407.2@-54.954,93.598
NetLED408_2: LED408.2 LED409.4 | length 104.6
  Component Side w0.203: LED409.4@-192.315,90.297 v1(-190.754,90.297) ; v1(-130.429,93.091) -130.236,93.284 cw(c-128.44,91.488) -128.44,94.028 -100.061,94.028 cw(c-100.061,92.471) -98.961,93.572 cw(c-100.061,92.471) -98.722,93.264 ccw(c-98.547,93.368) -98.582,93.168 cw(c-98.635,92.871) -98.34,92.932 ccw(c-98.141,92.973) -98.246,92.799 cw(c-99.06,91.455) -97.811,92.409 ccw(c-97.649,92.532) -97.649,92.329 -95.123,92.329 -93.017,92.329 ccw(c-93.017,93.726) -91.62,93.726
  Bottom Layer w0.203: v1(-190.754,90.297) cw(c-188.849,90.297) -188.849,92.202 -144.609,92.202 cw(c-144.609,90.468) -143.383,91.694 -143.238,91.549 ccw(c-141.442,93.345) -141.442,90.805 -139.101,90.805 ccw(c-139.101,93.345) -137.305,91.549 -137.287,91.567 cw(c-135.754,90.034) -135.754,92.202 -132.37,92.202 ccw(c-132.37,94.742) -130.574,92.946 v1(-130.429,93.091)
NetLED409_2: LED409.2 LED410.4 | length 45.6
  Component Side w0.203: LED410.4@-230.796,89.917 cw(c-229.146,89.917) -229.146,91.567 -227.076,91.567 -226.026,91.567 ccw(c-226.026,91.77) -225.865,91.646 ; -225.864,91.646 cw(c-223.611,89.917) -225.063,92.359 ; -225.062,92.359 cw(c-223.611,89.917) -223.611,92.758 -221.53,92.758 ccw(c-221.53,92.961) -221.506,92.759 cw(c-221.24,90.495) -220.974,92.759 ccw(c-220.95,92.961) -220.95,92.758 -204.089,92.758 -202.48,92.758 ccw(c-202.48,92.961) -202.456,92.759 cw(c-202.19,90.495) -201.924,92.759 ccw(c-201.9,92.961) -201.9,92.758 -195.961,92.758 cw(c-195.961,90.297) -194.457,92.244 ccw(c-194.333,92.405) -194.333,92.202 -188.811,92.202 ccw(c-188.811,93.598) LED409.2@-187.415,93.598
NetLED410_2: LED410.2 LED411.4 | length 45
  Component Side w0.203: LED411.4@-266.61,90.298 -266.602,90.306 cw(c-264.806,88.51) -264.806,91.05 -260.96,91.05 cw(c-260.96,90.748) -260.927,91.048 -260.927,91.059 -260.902,91.059 ccw(c-260.902,91.262) -260.705,91.215 ; -260.704,91.216 cw(c-259.34,90.895) -259.198,92.289 cw(c-259.34,90.895) -257.961,91.148 cw(c-259.34,90.895) -257.941,90.975 ccw(c-257.738,90.987) -257.935,90.937 ccw(c-257.111,91.148) -257.524,90.404 ccw(c-257.425,90.582) -257.425,90.379 -257.11,90.379 -256.623,90.379 cw(c-256.623,90.077) -256.514,90.358 ccw(c-256.441,90.548) -256.441,90.345 -253.506,90.345 -250.571,90.345 -246.183,90.345 ccw(c-246.184,90.548) -246.034,90.411 cw(c-243.332,87.955) -244.883,91.26 cw(c-243.332,87.955) -243.332,91.606 -242.824,91.606 -242.396,91.606 ccw(c-242.396,91.809) -242.224,91.702 cw(c-240.29,90.495) -238.61,92.036 ; -239.18,92.486 cw(c-240.29,90.495) -238.61,92.036 ; LED410.2@-225.896,93.217 cw(c-227.143,93.217) -227.143,91.97 -229.147,91.97 -238.46,91.97 cw(c-238.46,92.173) -238.609,92.035 cw(c-238.46,92.173) -238.61,92.036
NetLED411_2: LED411.2 LED412.4 | length 36
  Component Side w0.203: -284.147,78.34 -284.147,86.233 cw(c-281.607,86.233) -281.607,88.773 v1(-275.336,88.773) ; v1(-261.874,92.329) -261.874,93.434 cw(c-261.71,93.434) LED411.2@-261.71,93.598
  Bottom Layer w0.203: v1(-275.336,88.773) -275.336,90.17 cw(c-272.796,90.17) -272.796,92.71 -262.255,92.71 cw(c-262.255,92.329) v1(-261.874,92.329)
NetLED412_2: LED412.2 LED413.4 | length 22
  Component Side w0.203: -284.479,54.647 -284.479,54.437 ccw(c-282.748,54.437) v1(-283.972,53.213) ; v1(-282.538,71.718) -281.56,71.718
  Bottom Layer w0.203: v1(-283.972,53.213) -283.972,70.594 cw(c-282.829,70.594) -282.829,71.737 -282.81,71.718 v1(-282.538,71.718)
NetLED413_2: LED413.2 LED414.4 | length 73.7
  Component Side w0.203: -281.179,49.447 -281.179,49.747 -276.606,49.747 cw(c-276.606,47.207) -274.066,47.207 -274.066,43.154 ccw(c-271.526,43.154) -273.322,41.358 -263.937,31.973 -263.157,31.193 cw(c-264.668,29.682) -262.531,29.682 -262.531,27.573 ccw(c-259.588,27.573) -262.531,27.54 ; v1(-262.531,25.908) -262.531,27.537 ccw(c-262.734,27.538) -262.531,27.539 ; v1(-240.157,14.478) -240.157,8.981 ccw(c-239.051,8.981) LED414.4@-239.051,7.875
  Bottom Layer w0.203: v1(-262.531,25.908) -262.531,19.304 ccw(c-259.991,19.304) -259.991,16.764 -242.443,16.764 cw(c-242.443,14.478) v1(-240.157,14.478)
NetLED414_2: LED414.2 LED415.4 | length 24.8
  Component Side w0.203: LED414.2@-234.151,11.175 cw(c-232.88,11.175) -232.88,12.446 -225.588,12.446 ccw(c-225.588,14.986) -223.792,13.19 -223.375,13.607 cw(c-221.579,11.811) -221.579,14.351 -219.329,14.351 cw(c-219.329,11.811) -217.308,13.35 cw(c-219.329,11.811) -216.789,11.811 -216.789,8.854 ccw(c-215.683,8.854) -215.916,7.773 ccw(c-215.683,8.854) LED415.4@-215.683,7.748
NetLED415_2: LED415.2 LED416.4 | length 46.2
  Component Side w0.203: LED415.2@-210.783,11.048 -205.904,11.048 ccw(c-205.904,13.588) -204.108,11.792 -203.055,12.845 cw(c-201.259,11.049) -201.259,13.589 v1(-176.53,13.589) ; v1(-166.877,13.588) v1(-166.877,13.588) -165.444,13.588
  Bottom Layer w0.203: v1(-176.53,13.589) v1(-166.877,13.588) v1(-166.877,13.588)
NetQ301_1: Q301.1 R305.1 | length 1.9
  Component Side w0.203: R305.1@-130.033,88.265 cw(c-128.442,88.265) -129.567,89.39 Q301.1@-129.102,89.855
NetQ501_1: Q501.1 Q502.3 R568.1 | length 16.2
  Component Side w0.203: R568.1@-118.76,76.2 cw(c-118.036,76.924) -119.06,76.924 Q501.1@-119.06,77.794 cw(c-118.241,77.794) -118.241,78.613 -116.589,78.613 cw(c-116.588,78.41) -116.451,78.56 ccw(c-114.328,80.899) -114.328,77.74 -107.916,77.74 cw(c-107.916,76) Q502.3@-106.176,76
NetQ502_1: Q502.1 R569.2 R570.1 | length 3.2
  Component Side w0.203: Q502.1@-103.776,75.05 cw(c-103.476,75.05) -103.476,75.35 R569.2@-100.711,75.35
NRST: C309.1 U301.7 | length 7.4
  Component Side w0.203: U301.7@-27.017,55.114 -25.273,55.114 ccw(c-25.273,56.384) -24.526,55.357 ccw(c-25.273,56.384) -24.246,55.637 ccw(c-25.273,56.384) -24.003,56.384 -24.003,59.636 C309.1@-24.257,59.89
PA1: D202.2 D204.2 D206.2 D208.2 D210.2 D212.2 D214.2 U301.11 | length 264
  Component Side w0.203: D214.2@-248.539,81.78 -246.987,81.78 ccw(c-246.987,81.983) -246.784,81.983 -246.784,82.235 cw(c-246.482,82.235) -246.482,82.537 -245.262,82.537 cw(c-245.262,82.235) -244.974,82.325 ccw(c-244.78,82.386) -244.78,82.183 -242.697,82.183 -228.346,82.183 -210.388,82.183 ccw(c-210.388,82.386) -210.194,82.325 cw(c-209.906,82.235) -209.906,82.537 -208.686,82.537 cw(c-208.686,82.235) -208.398,82.325 ccw(c-208.204,82.386) -208.204,82.183 -203.835,82.183 -190.246,82.183 -172.161,82.183 ccw(c-172.161,82.386) -171.967,82.325 cw(c-171.679,82.235) -171.679,82.537 -170.459,82.537 cw(c-170.459,82.235) -170.171,82.325 ccw(c-169.977,82.386) -169.977,82.183 -161.163,82.183 -136.765,82.183 v1(-136.525,82.423) ; v1(-126.619,82.423) -126.379,82.183 -122.174,82.183 -116.281,82.183 ccw(c-116.281,82.386) -116.087,82.325 cw(c-115.799,82.235) -115.799,82.537 -114.579,82.537 cw(c-114.579,82.235) -114.291,82.325 ccw(c-114.097,82.386) -114.097,82.183 -113.867,82.183 -107.315,82.183 -95.961,82.183 ccw(c-95.961,82.386) -95.767,82.325 cw(c-95.479,82.235) -95.479,82.537 -94.259,82.537 cw(c-94.259,82.235) -93.971,82.325 ccw(c-93.777,82.386) -93.777,82.183 -77.978,82.183 -72.644,82.183 -57.861,82.183 ccw(c-57.861,82.386) -57.667,82.325 cw(c-57.379,82.235) -57.379,82.537 -56.159,82.537 cw(c-56.159,82.235) -55.871,82.325 ccw(c-55.677,82.386) -55.677,82.183 -39.116,82.183 -37.719,82.183 -19.761,82.183 ccw(c-19.761,82.386) -19.567,82.325 cw(c-19.279,82.235) -19.279,82.537 -18.059,82.537 cw(c-18.059,82.235) -17.757,82.235 -17.757,81.325 cw(c-18.059,81.325) -18.059,81.023 -18.063,81.023 ccw(c-18.063,80.82) -18.266,80.82 -18.266,76.996 cw(c-21.209,76.996) -19.127,74.915 -26.232,67.81 ccw(c-24.436,66.014) -26.976,66.014 -26.976,59.667 ccw(c-25.931,59.667) -26.671,58.929 -26.083,58.341 cw(c-26.812,57.612) -25.781,57.612 cw(c-26.279,57.612) -26.279,57.114 U301.11@-27.017,57.114 ; U301.11@-27.051,57.066 U301.11@-27.017,57.066 ; -26.67,58.928 -26.607,58.864
  Bottom Layer w0.203: v1@-136.398,82.296 -136.271,82.169 -126.98,82.169 -126.726,82.423 v1(-126.619,82.423)
PA2: D201.2 D203.2 D205.2 D207.2 D209.2 D211.2 D213.2 U301.12 | length 261.8
  Component Side w0.203: D213.2@-245.872,81.78 -229.461,81.78 cw(c-229.461,81.577) -229.258,81.577 -229.258,81.325 ccw(c-228.956,81.325) -228.956,81.023 -227.736,81.023 ccw(c-227.736,81.325) -227.434,81.325 -227.434,81.577 cw(c-227.231,81.577) -227.231,81.78 D211.2@-209.296,81.78 -191.361,81.78 cw(c-191.361,81.577) -191.158,81.577 -191.158,81.325 ccw(c-190.856,81.325) -190.856,81.023 -189.636,81.023 ccw(c-189.636,81.325) -189.334,81.325 -189.334,81.577 cw(c-189.131,81.577) -189.131,81.78 D209.2@-171.069,81.78 -153.134,81.78 cw(c-153.134,81.577) -152.931,81.577 -152.931,81.325 ccw(c-152.629,81.325) -152.629,81.023 -151.409,81.023 ccw(c-151.409,81.325) -151.107,81.325 -151.107,81.577 cw(c-150.904,81.577) -150.904,81.78 -136.771,81.78 v1(-136.525,81.534) ; v1(-126.619,81.534) -126.373,81.78 D207.2@-115.189,81.78 -113.637,81.78 cw(c-113.637,81.577) -113.434,81.577 -113.434,81.325 ccw(c-113.132,81.325) -113.132,81.023 -111.912,81.023 ccw(c-111.912,81.325) -111.61,81.325 -111.61,81.577 cw(c-111.407,81.577) -111.407,81.78 D205.2@-94.869,81.78 -91.948,81.78 -76.934,81.78 cw(c-76.934,81.577) -76.731,81.577 -76.731,81.325 ccw(c-76.429,81.325) -76.429,81.023 -75.209,81.023 ccw(c-75.209,81.325) -74.907,81.325 -74.907,81.577 cw(c-74.704,81.577) -74.704,81.78 D203.2@-56.769,81.78 -38.834,81.78 cw(c-38.834,81.577) -38.631,81.577 -38.631,81.325 ccw(c-38.329,81.325) -38.329,81.023 -37.109,81.023 ccw(c-37.109,81.325) -36.807,81.325 -36.807,81.577 cw(c-36.604,81.577) -36.604,81.78 D201.2@-18.669,81.78 -18.669,76.996 cw(c-21.209,76.996) -19.413,75.199 -26.518,68.095 ccw(c-24.436,66.014) -27.379,66.014 -27.379,57.659 -27.334,57.614 U301.12@-27.178,57.614
  Bottom Layer w0.203: v1(-136.525,81.534) -136.449,81.61 -136.322,81.61 -136.166,81.766 -126.958,81.766 -126.726,81.534 v1(-126.619,81.534)
PA3: R569.1 U301.13 | length 92.5
  Component Side w0.203: R569.1@-100.711,76.65 ccw(c-99.318,78.043) -99.318,76.073 -41.582,76.073 ccw(c-41.582,76.507) v1(-41.275,76.2) ; U301.13@-28.492,59.089 -28.492,61.236 cw(c-28.289,61.236) -28.474,61.318 ccw(c-31.532,62.678) -28.194,62.44 cw(c-27.991,62.425) -28.194,62.445 ccw(c-29.843,62.609) -28.186,62.609 -28.186,69.314 cw(c-25.646,69.314) -27.442,71.11 v1(-26.035,72.517)
  Bottom Layer w0.203: v1(-41.275,76.2) cw(c-39.995,74.92) -41.194,76.276 cw(c-39.995,74.92) -40.695,76.589 cw(c-39.995,74.92) -40.278,76.708 cw(c-39.995,74.92) -39.995,76.73 -28.216,76.73 cw(c-28.216,74.803) -26.289,74.803 -26.289,73.194 ccw(c-25.422,73.194) v1@-26.036,72.581 ; v1(-26.035,72.517) v1@-26.035,72.58
"PA7 - MOSI": U301.17 U303.2 | length 24.8
  Component Side w0.203: U301.17@-30.492,59.089 -30.492,59.528 cw(c-29.048,59.528) -30.069,60.549 -29.736,60.882 ccw(c-31.532,62.678) -28.992,62.678 -28.992,70.859 cw(c-26.452,70.859) -28.248,72.655 -22.588,78.315 ccw(c-24.384,80.111) -21.844,80.111 U303.2@-21.844,80.667
PA10: D216.2 D218.2 D220.2 D222.2 D224.2 D226.2 D228.2 U301.31 | length 215.1
  Component Side w0.203: v1(-127.127,63.373) -127.367,63.133 -141.529,63.133 cw(c-141.529,63.336) -141.723,63.275 ccw(c-142.011,63.185) -142.011,63.487 -143.231,63.487 ccw(c-143.231,63.185) -143.519,63.275 cw(c-143.713,63.336) -143.713,63.133 -158.623,63.133 -164.084,63.133 -179.502,63.133 cw(c-179.502,63.336) -179.696,63.275 ccw(c-179.984,63.185) -179.984,63.487 -181.204,63.487 ccw(c-181.204,63.185) -181.492,63.275 cw(c-181.686,63.336) -181.686,63.133 -197.104,63.133 -201.93,63.133 -216.205,63.133 cw(c-216.205,63.336) -216.399,63.275 ccw(c-216.687,63.185) -216.687,63.487 -217.907,63.487 ccw(c-217.907,63.185) -218.195,63.275 cw(c-218.389,63.336) -218.389,63.133 -236.771,63.133 ccw(c-236.771,61.757) D228.2@-237.556,62.887 ; v1(-120.777,63.373) -120.67,63.373 -120.43,63.133 -106.905,63.133 -105.791,63.133 -104.089,63.133 ccw(c-104.089,63.336) -103.895,63.275 cw(c-103.607,63.185) -103.607,63.487 -102.387,63.487 cw(c-102.387,63.185) -102.099,63.275 ccw(c-101.905,63.336) -101.905,63.133 -87.376,63.133 -77.724,63.133 -67.386,63.133 ccw(c-67.386,63.336) -67.192,63.275 cw(c-66.904,63.185) -66.904,63.487 -65.684,63.487 cw(c-65.684,63.185) -65.396,63.275 ccw(c-65.202,63.336) -65.202,63.133 -49.733,63.133 ccw(c-49.733,63.336) -49.539,63.275 cw(c-49.251,63.185) -49.251,63.487 -48.031,63.487 cw(c-48.031,63.185) -47.729,63.185 -47.729,62.933 ccw(c-47.526,62.933) -47.526,62.73 D216.2@-45.974,62.73 v1(-45.974,60.96) ; U301.31@-35.467,54.614 -34.929,54.614 cw(c-34.929,53.721) -34.036,53.721 v1(-34.036,53.34) ; D228.2@-237.556,62.887 ccw(c-236.771,61.757) D228.2@-237.744,62.73 cw(c-237.587,62.73) -237.587,62.887 D228.2@-237.556,62.887
  Bottom Layer w0.203: v1(-127.127,63.373) -127.02,63.373 -126.766,63.119 -121.138,63.119 -120.884,63.373 v1(-120.777,63.373) ; v1(-45.974,60.96) -45.974,59.764 ccw(c-43.434,59.764) -45.23,57.968 -41.749,54.487 ccw(c-39.953,56.283) -39.953,53.743 -35.009,53.743 cw(c-35.009,52.367) v1(-34.036,53.34)
PA13/SWDIO: CON302.2 CON303.2 U301.34 | length 25.3
  Component Side w0.203: CON303.2@-53.213,53.34 cw(c-53.213,51.181) -51.076,51.49 cw(c-53.213,51.181) -51.054,51.211 ; CON302.2@-51.435,49.403 ccw(c-51.435,49.784) -51.054,49.784 -51.054,51.181 ccw(c-53.213,51.181) -51.054,51.21 ; v1(-37.338,52.705) -37.338,52.959 cw(c-36.964,52.585) -36.964,53.114 U301.34@-35.467,53.114
  Bottom Layer w0.203: CON303.2@-53.213,53.34 cw(c-51.308,53.34) -51.308,55.245 -44.7,55.245 cw(c-44.7,52.705) -42.904,54.501 -42.525,54.122 -42.319,53.916 ccw(c-39.953,56.283) -39.953,52.937 -37.898,52.937 cw(c-37.898,52.145) v1(-37.338,52.705)